# Altium PCB DVL_InterfaceRevA.PcbDoc
Units mil, origin at the board's own origin, x right, y up, seen from the top; angles counter-clockwise.
Board outline 1860 x 1770 mil, 2 copper layers (Top Layer, Bottom Layer); 27 components, 26 nets, 99 pads, 16 vias.
Unrouted connection lines stored in the file: 2.
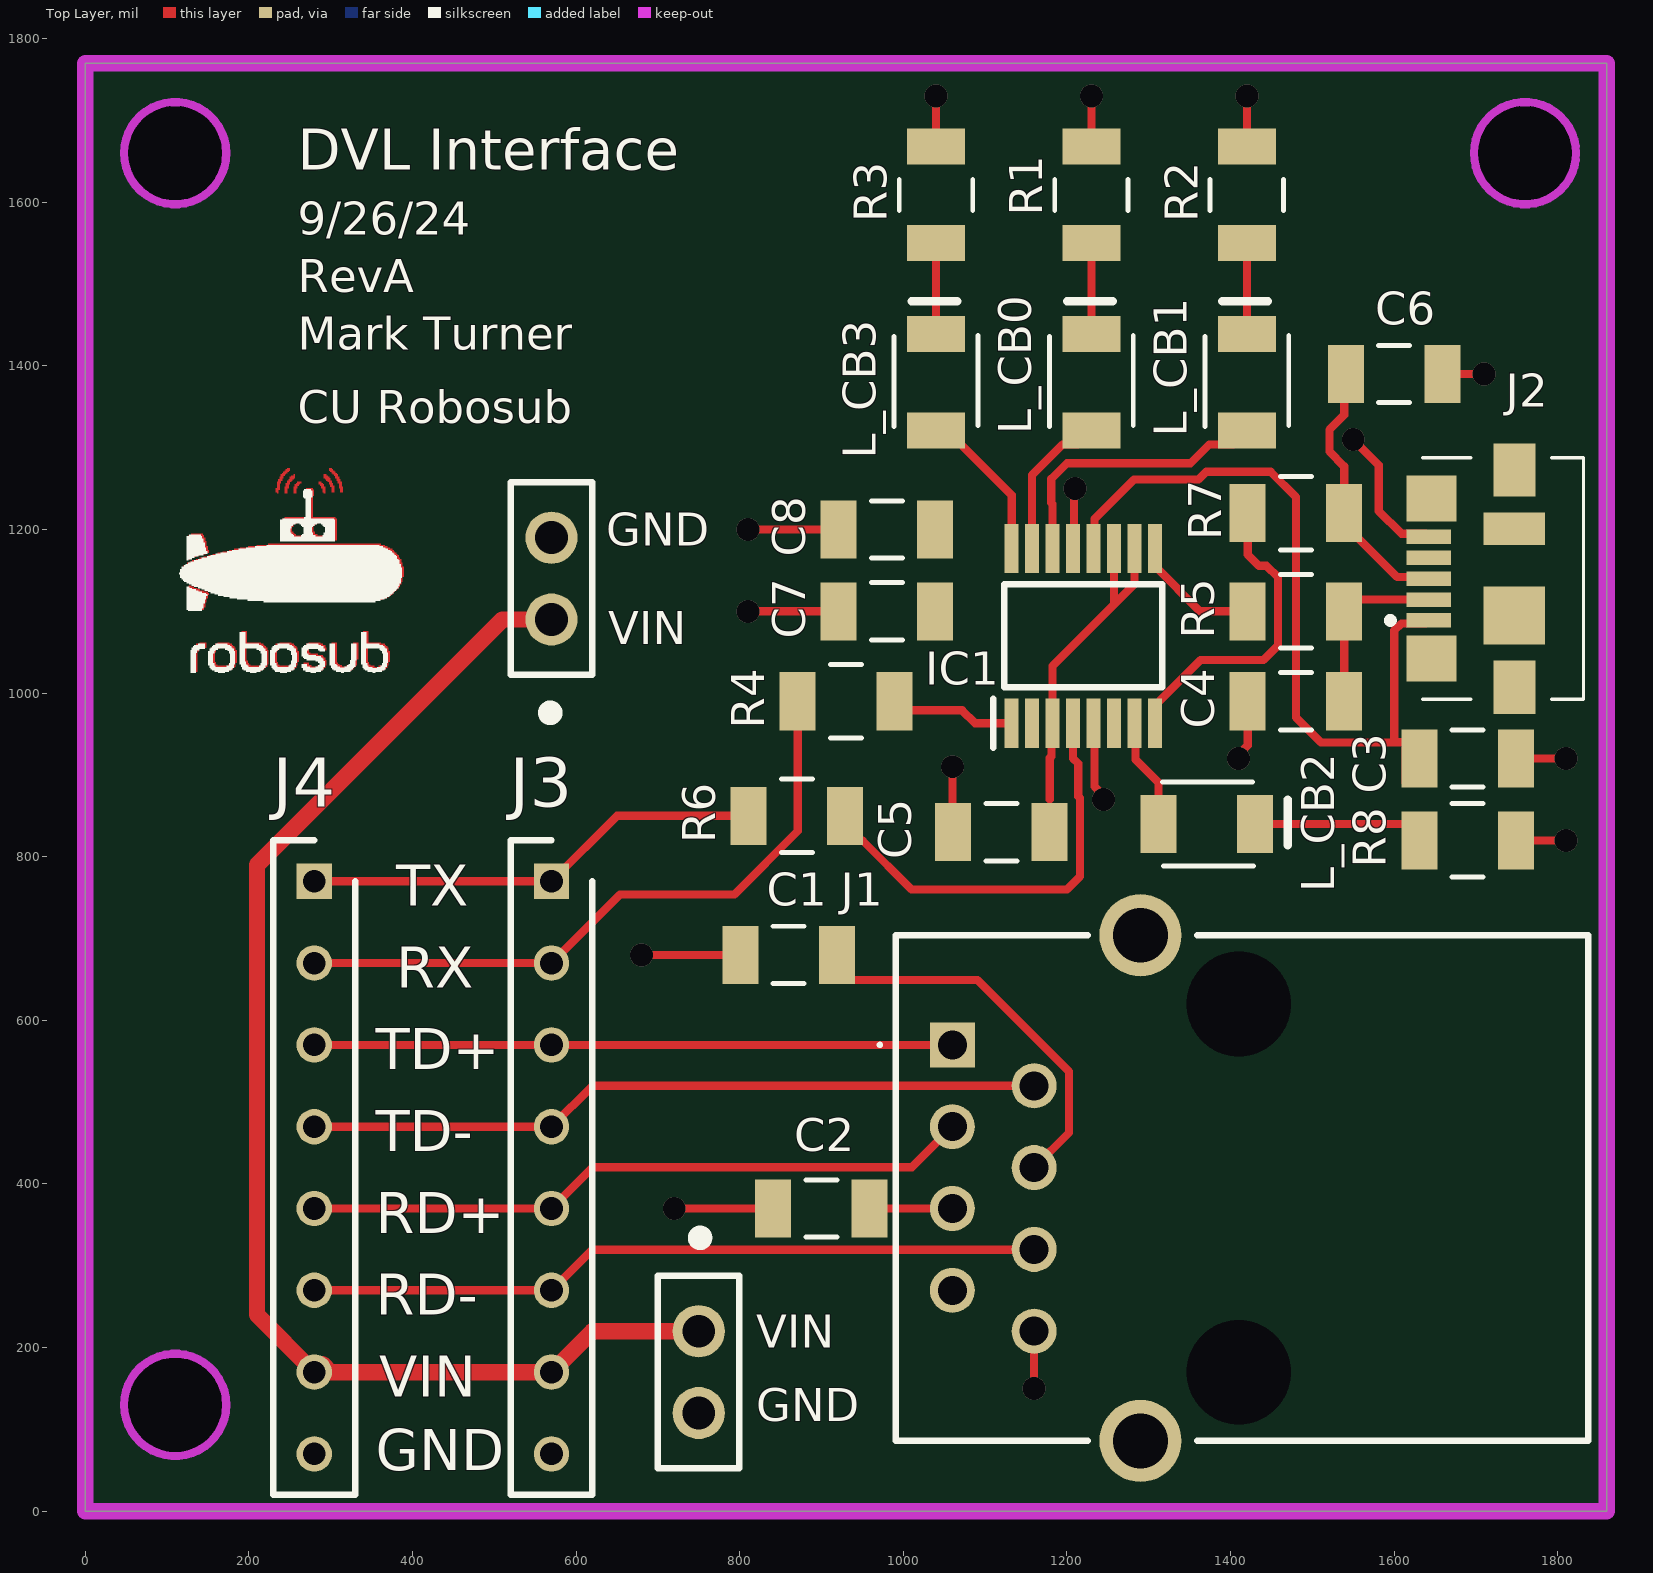
[diagram p0: Top Layer view]
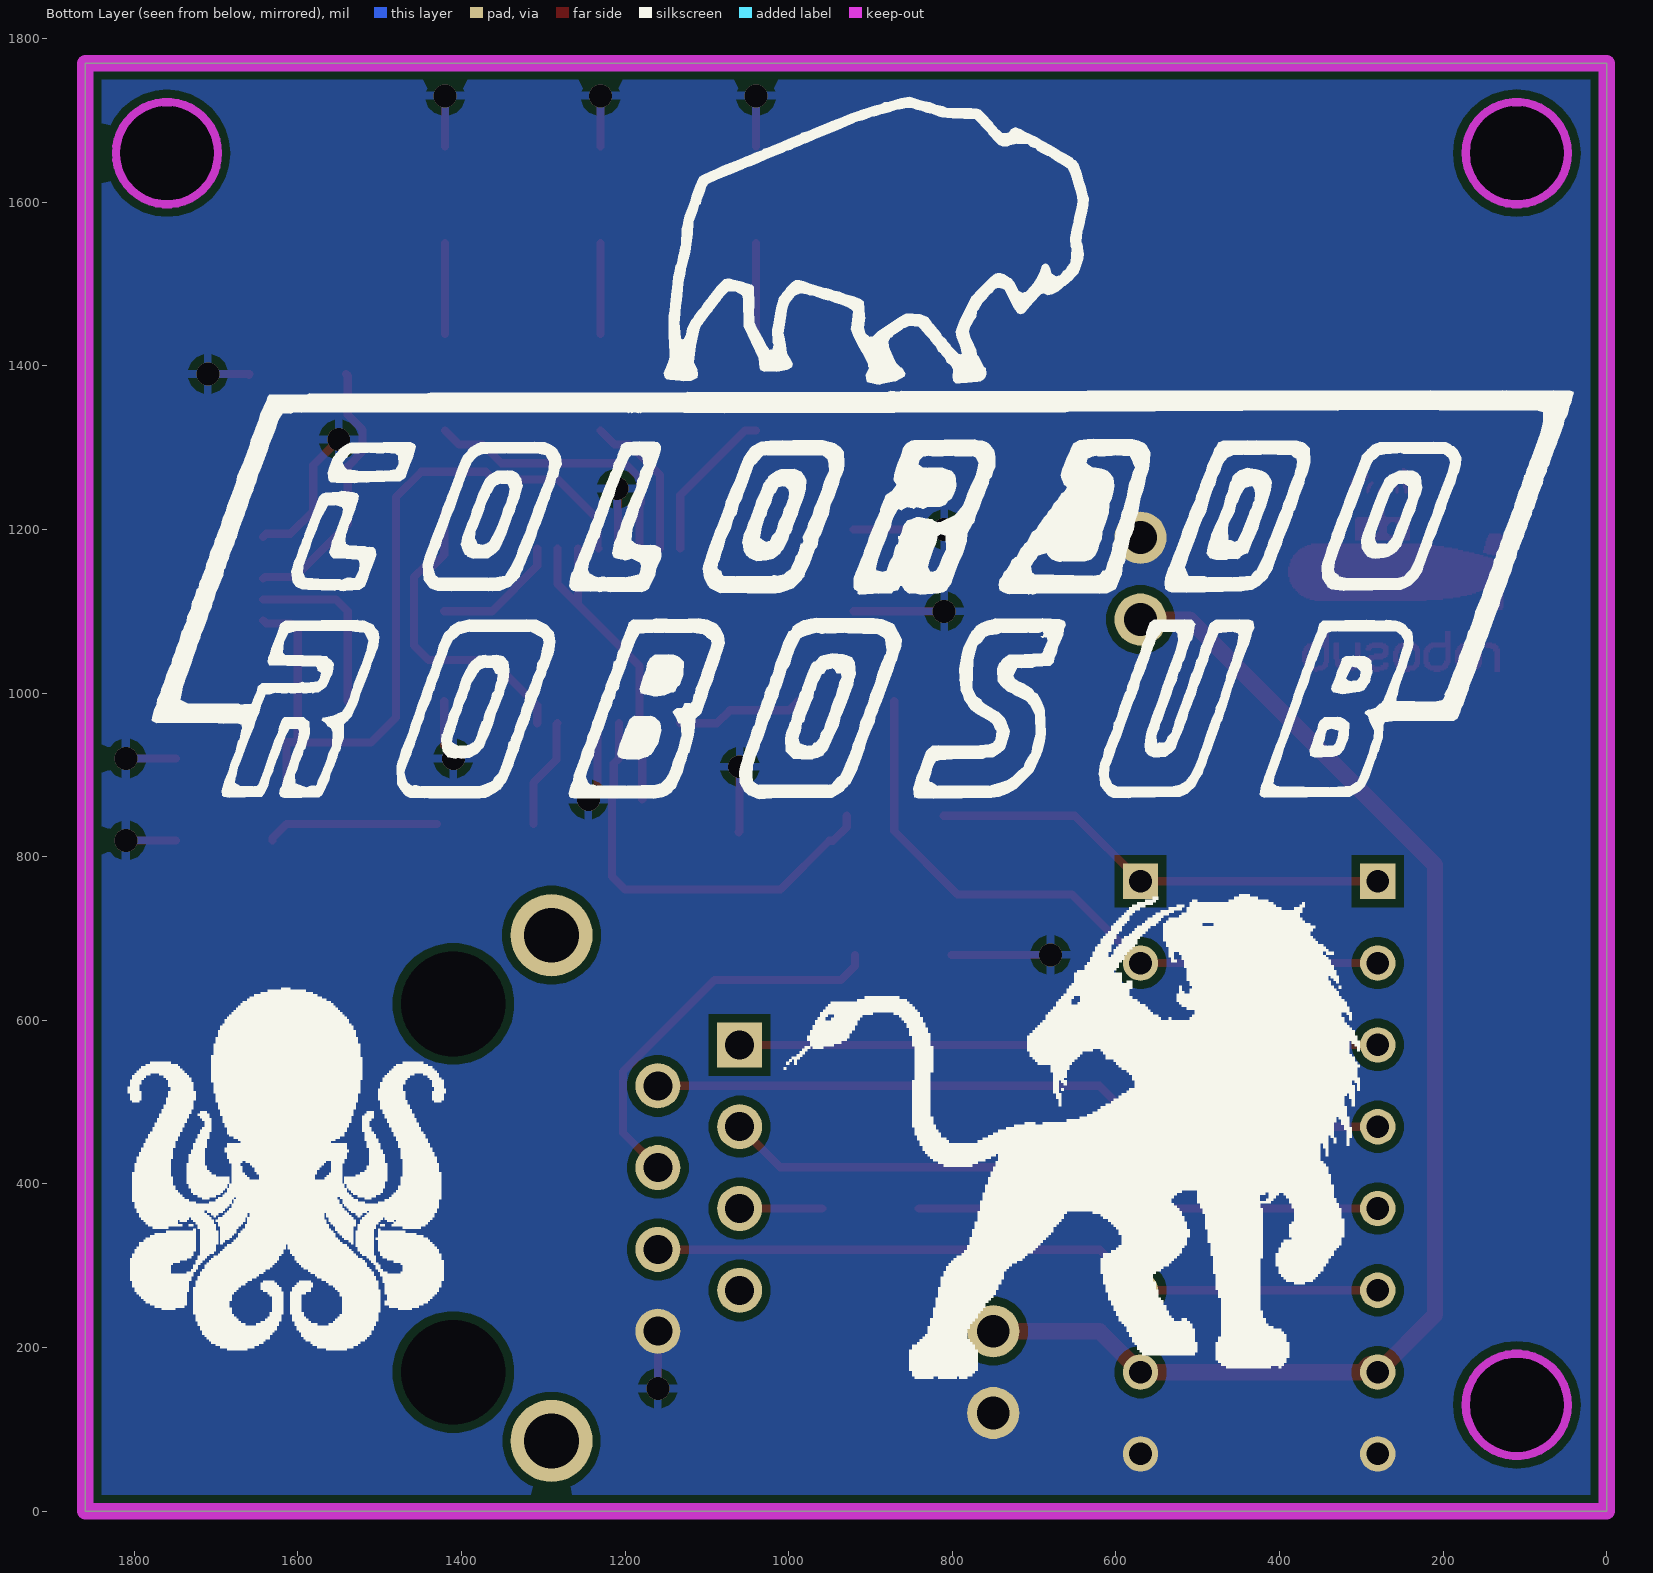
[diagram p1: Bottom Layer view, seen from below]
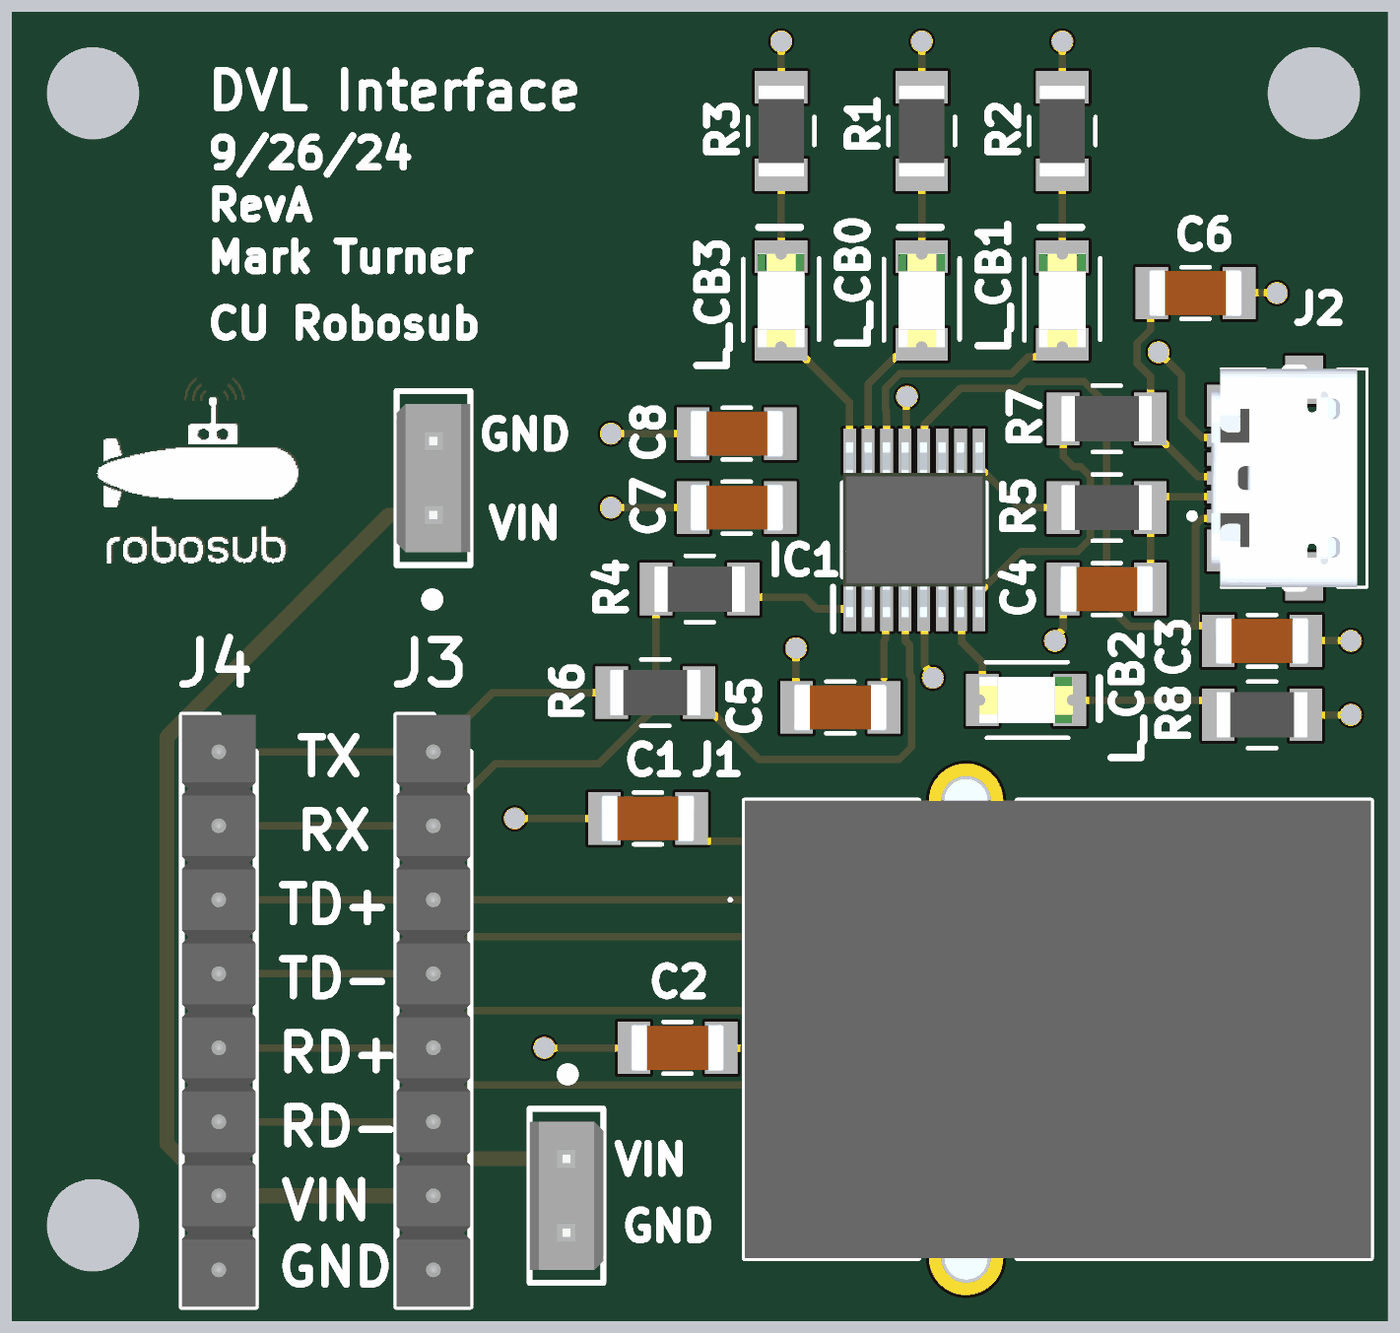
[diagram p2: 3D render of the assembled board from above, using the file's embedded part models]

## Layer stack, top to bottom
Top Solder: solder mask 0.4, Solder Resist, Dk 3.5
Top Layer: signal copper 1.4
Dielectric 1: dielectric 12.6, FR-4, Dk 4.8
Bottom Layer: signal copper 1.4
Bottom Solder: solder mask 0.4, Solder Resist, Dk 3.5

## Board outline
0,0 1860,0 1860,1770 0,1770
cut-out: 47.5,1660 cw(c110,1660) 110,1722.5 cw(c110,1660) 172.5,1660 cw(c110,1660) 110,1597.5 cw(c110,1660)
cut-out: 47.5,130 cw(c110,130) 110,192.5 cw(c110,130) 172.5,130 cw(c110,130) 110,67.5 cw(c110,130)
cut-out: 1697.5,1660 ccw(c1760,1660) 1760,1597.5 ccw(c1760,1660) 1822.5,1660 ccw(c1760,1660) 1760,1722.5 ccw(c1760,1660)

## Design rules (kind name [scope] priority, off if disabled: settings)
BoardOutlineClearance [All] p1: gap=10 ignorepadtopadclearanceinfootprint=FALSE except(0: Arc-SplitContinuation Track-SplitContinuation SMDPad-SplitContinuation THPad-SplitContinuation Via-SplitContinuation Fill-SplitContinuation Poly-SplitContinuation Region-SplitContinuation Text-SplitContinuation)
Clearance [All] p1: gap=10 ignorepadtopadclearanceinfootprint=FALSE
PlaneConnect [All] p1: planeconnectstyle=Direct reliefexpansion=20 reliefentries=4 reliefconductorwidth=10 reliefairgap=10
PolygonConnect [All] p1: thpad.connectstyle=Direct thpad.reliefconductorwidth=10 thpad.reliefentries=4 thpad.polygonreliefangle="90 Angle" thpad.airgapwidth=10 smdpad.connectstyle=Relief smdpad.reliefconductorwidth=10 smdpad.reliefentries=4 smdpad.polygonreliefangle="90 Angle" smdpad.airgapwidth=10 via.connectstyle=Relief via.reliefconductorwidth=10 via.reliefentries=4 via.polygonreliefangle="90 Angle" via.airgapwidth=10
RoutingVias [All] p1: holewidth=13 width=25 viastyle="Through Hole" minholewidth=13 minwidth=25 maxholewidth=60 maxwidth=80
SolderMaskExpansion [All] p1: expansion=4 istentingtop=FALSE
SupplyNets "Schematic Supply Nets" [InNet('GND')] p1: voltage=0.000
UnRoutedNet [All] p1: checkbadconnections=TRUE
Width "Schematic Width Constraint_1" [InNet('VIN')] p1: maxlimit=100 minlimit=10 preferedwidth=20 minimp=50.000000 maximp=50.000000 favimp=50.000000
Width "Schematic Width Constraint" [InNet('GND')] p2: maxlimit=100 minlimit=10 preferedwidth=20 minimp=50.000000 maximp=50.000000 favimp=50.000000
Width [All] p3: maxlimit=20 minlimit=6 preferedwidth=6 minimp=50.000000 maximp=50.000000 favimp=50.000000
28 further rules are at their usual default settings.

## Components (designator, comment, footprint, x,y, rotation, side; value= is the part's Value field where it differs from the comment)
C1 "DNI?" 1206_Passive_Capacitor 860,680 r180 top
C2 "DNI?" 1206_Passive_Capacitor 900,370 r180 top
C3 "10nF" 1206_Passive_Capacitor 1690,920 r180 top
C4 "47pF" 1206_Passive_Capacitor 1480,990 r0 top
C5 "100nF" 1206_Passive_Capacitor 1120,830 r0 top
C6 "47pF" 1206_Passive_Capacitor 1600,1390 r180 top
C7 "100nF" 1206_Passive_Capacitor 980,1100 r0 top
C8 "4.7uF" 1206_Passive_Capacitor 980,1200 r0 top
GND "SW_2Pin_100mil_Switch" 2Pin-Header-Conn 570,1090 r90 top (schematic designator SW2)
IC1 "FT230XS-R" SOP64P599X175-16N 1220,1070 r90 top
J1 "ARJM11D7-009-NN-EW2" ARJM11D7009NNEW2 1060,570 r90 top
J2 "0473461001" 0473461001 1720,1140 r90 top
J3 "08-0625-70" HDRV8W51P0X254_1X8_2032X254X816P 570,770 r270 top
J4 "08-0625-70" HDRV8W51P0X254_1X8_2032X254X816P 280,770 r270 top
L_CB0 "Red" LED_1206 1230,1380 r90 top (schematic designator LED2)
L_CB1 "Red" LED_1206 1420,1380 r90 top (schematic designator LED3)
L_CB2 "Red" LED_1206 1371,840 r0 top (schematic designator LED4)
L_CB3 "Red" LED_1206 1040,1380 r90 top (schematic designator LED1)
R1 "10k" 1206_Passive_Resitor 1230,1609 r270 top value=50Ohm?
R2 "10k" 1206_Passive_Resitor 1420,1609 r90 top value=50Ohm?
R3 "10k" 1206_Passive_Resitor 1040,1609 r270 top value=50Ohm?
R4 "10k" 1206_Passive_Resitor 930,990 r0 top value=27Ohm?
R5 "27Ohm" 1206_Passive_Resitor 1480,1100 r0 top
R6 "10k" 1206_Passive_Resitor 870,850 r0 top value=27Ohm?
R7 "27Ohm" 1206_Passive_Resitor 1480,1220 r0 top
R8 "10k" 1206_Passive_Resitor 1690,820 r0 top value=50Ohm?
VIN "SW_2Pin_100mil_Switch" 2Pin-Header-Conn 750,220 r270 top (schematic designator SW1)

## Footprints (in the part's own frame and the unit in brackets; to place one, negate y for a bottom-side part, rotate by r counter-clockwise, add the part's x,y. Pads: shape width x height; smd on the part's side, far side on the other; paste and mask are expansions set on the pad)
2Pin-Header-Conn [mm]
  round 1.62 hole 1.02: 1(0,0) 2(2.54,0)
  silkscreen extent -3.03,-1.27 4.26,1.26, body extent -1.27,-1.27 3.81,1.27, height 8.13
1206_Passive_Capacitor [mil]
  rect 44x71 smd: 1(-59,0) 2(59,0)
  silkscreen extent -19,-35 19,35, body extent -63,-31 63,32, height 50
1206_Passive_Resitor [mil]
  rect 44x71 smd: 1(-59,0) 2(59,0)
  silkscreen extent -19,-45 19,45, body extent -61,-31 61,31, height 26
0473461001 [mm]
  rect 0.45x1.38 smd: 1(-1.3,1.975) 2(-0.65,1.975) 3(0,1.975) 4(0.65,1.975) 5(1.3,1.975)
  rect 1.425x1.55 smd: MP1(-2.487,1.89) MP2(2.487,1.89)
  rect 1.65x1.3 smd: MP3(-3.375,-0.685) MP6(3.375,-0.685)
  rect 1.8x1.9 smd: MP4(-1.15,-0.685)
  rect 1x1.9 smd: MP5(1.55,-0.685)
  silkscreen extent -3.75,-2.84 3.75,3.26, body extent -3.9,-2.5 3.9,2.5, height 2.72
ARJM11D7009NNEW2 [mm]
  rect 1.4x1.4 hole 0.9: J1(0,0)
  round 1.4 hole 0.9: J2(-1.27,-2.54) J3(-2.54,0) J4(-3.81,-2.54) J5(-5.08,0) J6(-6.35,-2.54) J7(-7.62,0) J8(-8.89,-2.54)
  round 2.55 hole 1.7: MH1(3.405,-5.84) MH2(-12.295,-5.84)
  round 1.625 hole 3.25 unplated: MH3(-10.16,-8.89) MH4(1.27,-8.89)
  silkscreen extent -12.29,-19.74 3.4,2.3, body extent -13.05,-19.74 4.16,1.76, height 14.15
HDRV8W51P0X254_1X8_2032X254X816P [mm]
  rect 1.1x1.1 hole 0.7: 1(0,0)
  round 1.1 hole 0.7: 2(2.54,0) 3(5.08,0) 4(7.62,0) 5(10.16,0) 6(12.7,0) 7(15.24,0) 8(17.78,0)
  silkscreen extent -1.27,-1.27 19.05,1.27, body extent -1.27,-1.27 19.05,1.27, height 8.16
LED_1206 [mil]
  rect 44x71 smd: 1(-59,0) 2(59,0)
  silkscreen extent -54,-51 99,51, body extent -63,-31 63,31, height 28
SOP64P599X175-16N [mm]
  rect 1.526x0.435 smd: 1(-2.712,2.222) 2(-2.712,1.588) 3(-2.712,0.952) 4(-2.712,0.318) 5(-2.712,-0.318) 6(-2.712,-0.952) 7(-2.712,-1.588) 8(-2.712,-2.222) 9(2.712,-2.222) 10(2.712,-1.588) 11(2.712,-0.952) 12(2.712,-0.318) 13(2.712,0.318) 14(2.712,0.952) 15(2.712,1.588) 16(2.712,2.222)
  silkscreen extent -3.47,-2.45 1.6,2.79, body extent -3,-2.45 3,2.45, height 1.75

## Part data
C1 C2 C3 C5 C7 C8: library part C_10uF_1206, "10uF ±10% 50V X5R 1206 Multilayer Ceramic Capacitors MLCC - SMD/SMT RoHS", LCSC Part#=C13585, MFR Part #=CL31A106KBHNNNE, Datasheet=https://datasheet.lcsc.com/lcsc/1810221112_Samsung-Electro-Mechanics-CL31A106KBHNNNE_C13585.pdf, Type=Basic
C4 C6: library part C_47nF_1206, "47nF ±5% 50V C0G 1206 Multilayer Ceramic Capacitors MLCC - SMD/SMT RoHS", LCSC Part#=C21812, MFR Part #=GRM31M5C1H473JA01L, Datasheet=https://datasheet.lcsc.com/lcsc/1810201313_Murata-Electronics-GRM31M5C1H473JA01L_C21812.pdf, Type=Extended
GND VIN: "2Pin Header", LCSC Part#=C124375, Type=Extended
IC1: "Integrated Circuit", Manufacturer_Name="FTDI Chip", Mouser Part Number=895-FT230XS-R, Arrow Part Number=FT230XS-R, Arrow Price/Stock=http://www.arrow.com/en/products/ft230xs-r/ftdi-chip, Datasheet Link=http://www.ftdichip.com/Support/Documents/DataSheets/ICs/DS_FT230X.pdf, Height=1.753mm, Manufacturer_Part_Number=FT230XS-R, Mouser Price/Stock=https://www.mouser.co.uk/ProductDetail/FTDI/FT230XS-R?qs=Gp1Yz1mis3XyCLeYOseSng%3D%3D
J1: "Connector", Manufacturer_Name=ABRACON, Mouser Part Number=815-RJM11D7009NNEW2, Arrow Part Number=ARJM11D7-009-NN-EW2, Arrow Price/Stock=null?region=nac, Datasheet Link=https://abracon.com/Magnetics/ARJM11.pdf, Height=14.05mm, Manufacturer_Part_Number=ARJM11D7-009-NN-EW2, Mouser Price/Stock=https://www.mouser.co.uk/ProductDetail/ABRACON/ARJM11D7-009-NN-EW2?qs=YCa%2FAAYMW03eZFC4XXAjJg%3D%3D
J2: "Connector", Manufacturer_Name=Molex, Mouser Part Number=N/A, Arrow Part Number=0473461001, Arrow Price/Stock=https://www.arrow.com/en/products/0473461001/molex?region=nac, Datasheet Link=https://componentsearchengine.com/Datasheets/1/0473461001.pdf, Height=2.45mm, Manufacturer_Part_Number=0473461001, Mouser Price/Stock=https://www.mouser.co.uk/ProductDetail/Molex/0473461001?qs=2bnkQPT%252BPafTZgGVt%2FOGfA%3D%3D
J3 J4: "Connector", Manufacturer_Name=ARIES, Mouser Part Number=535-08-0625-70, Datasheet Link=https://www.mouser.in/datasheet/2/35/12036-pin-line-header-1224908.pdf, Height=8.16mm, Manufacturer_Part_Number=08-0625-70, Mouser Price/Stock=https://www.mouser.co.uk/ProductDetail/Aries-Electronics/08-0625-70?qs=BpaRKvA4VqGb7C%252By2JfgtQ%3D%3D
L_CB0 L_CB1 L_CB2 L_CB3: library part LED_RED_1206, "Red 621~631nm 1206 Light Emitting Diodes (LED) RoHS", LCSC Part#=C93133, MFR Part #=15-21/R6C-FQ1R1B/2T, Datasheet=https://datasheet.lcsc.com/szlcsc/1811151241_Everlight-Elec-15-21-R6C-FQ1R1B-2T_C93133.pdf, Type=Extended
R1 R2 R3 R4 R6 R8: library part R_10KOhm_1206, "10 kOhms ±5% 0.25W, 1/4W Chip Resistor 1206 (3216 Metric) Automotive AEC-Q200 Thick Film", LCSC Part#=C17902, MFR Part #=RMCF1206FT10K0, Digikey Link=https://www.digikey.com/en/products/detail/stackpole-electronics-inc/RMCF1206FT10K0/1759669, Type=Basic
R5 R7: library part R_22Ohm_1206, "CHIP RESISTOR - SURFACE MOUNT 22OHMS ±1% 1/4W 1206 ROHS", LCSC Part#=C17958, MFR Part #=1206W4F220JT5E, Type=Basic

## Via types
v1: diameter 28, hole 28, Top Layer to Bottom Layer, 16 vias

## Nets (pads, with @x,y where several pads share a name; then routed paths per layer and width w, separated by ;. In a path a pad name is that pad's centre, name@x,y a point inside that pad or via, vN(x,y) a via of type N, cw(c..) or ccw(c..) an arc to the next point about the centre after c; other vN are vias at no path point)
GND: C1.2 C2.2 C3.1 C4.1 C5.1 C6.1 C7.1 C8.1 GND.2 IC1.5 IC1.13 J1.J8 J2.5 J3.8 J4.8 R1.1 R2.2 R3.1 R8.2 VIN.2 | length 1396.5
  Top Layer w10: v1(680,680) C1.2 ; v1(720,370) C2.2 ; v1(810,1100) C7.1 ; v1(810,1200) C8.1 ; R3.1 v1(1040,1730) ; v1(1060,910) 1060,831 C5.1 ; v1(1160,150) J1.J8 ; IC1.13 1208.74,1178.03 1208.74,1248.74 v1(1210,1250) ; R1.1 v1(1230,1730) ; IC1.5 1233.92,961.83 1233.92,885.95 1245,874.87 v1(1245,870) ; v1(1410,920) 1410,924.87 1421,935.87 C4.1 ; R2.2 v1(1420,1730) ; v1(1550,1310) 1581.15,1278.85 1581.15,1222.57 1608.87,1194.86 1638.56,1194.86 J2.5 ; C6.1@1660,1389 C6.1 v1(1710,1390) ; R8.2 v1(1810,820) ; C3.1 v1(1810,920)
NetC1_1: C1.1 J1.J4 | length 485.7
  Top Layer w10: C1.1 919,666.5 936,649.5 1090.69,649.5 1202.56,537.63 1202.56,462.56 J1.J4
NetC2_1: C2.1 J1.J5 | length 101
  Top Layer w10: C2.1 J1.J5
NetC4_2: C4.2 J2.2 R5.2 | length 219.2
  Top Layer w10: C4.2 R5.2 1553.41,1114.41 J2.2
NetC5_2: C5.2 IC1.3 IC1.10 IC1.11 | length 418.2
  Top Layer w10: 1179,870 1179,920.5 1181.04,922.54 1181.04,961.75 IC1.3 1182.52,1033.22 1257.48,1108.18 ; IC1.11 1257.48,1108.18 ; IC1.10 1282.52,1133.22 1257.48,1108.18
NetC6_2: C6.2 J2.3 R7.2 | length 330
  Top Layer w10: C6.2 1539,1388 1539,1340.01 1521,1322.01 1521,1295.26 1539,1277.26 R7.2 1539,1206.5 1603.77,1141.73 1640.51,1141.73 J2.3
NetIC1_1: IC1.1 R4.2 | length 154.6
  Top Layer w10: R4.2 1000,979 1072.01,979 1087.78,963.23 IC1.1
NetIC1_4: IC1.4 R6.2 | length 529.6
  Top Layer w10: R6.2 929,836.5 946,819.5 950.5,819.5 1010,760 1200,760 1216,776 1216,871.71 1213.92,873.8 1213.92,913.8 1207.48,920.23 IC1.4
NetIC1_7: IC1.7 L_CB2.1 | length 135.4
  Top Layer w10: IC1.7 1283.92,961.83 1283.92,918.58 1312,890.5 L_CB2.1
NetIC1_8: IC1.8 R7.1 | length 384.9
  Top Layer w10: IC1.8 1307.48,984.7 1363.28,1040.5 1440.21,1040.5 1458,1058.29 1458,1141.71 1444.11,1155.61 1434.89,1155.61 1421,1169.5 R7.1
NetIC1_9: IC1.9 R5.1 | length 157.9
  Top Layer w10: IC1.9 1307.48,1155.3 1362.78,1100 R5.1
NetIC1_14: IC1.14 L_CB1.1 | length 349.3
  Top Layer w10: IC1.14 1182.52,1231.15 1181,1232.67 1181,1262.01 1199.99,1281.01 1351.01,1281.01 1374,1304 1403,1304 L_CB1.1
NetIC1_15: IC1.15 L_CB0.1 | length 185
  Top Layer w10: IC1.15 1157.48,1266.78 1194.7,1304 1213,1304 L_CB0.1
NetIC1_16: IC1.16 L_CB3.1 | length 190.5
  Top Layer w10: L_CB3.1 1053.5,1321 1132.52,1241.98 IC1.16
NetLED1_2: L_CB3.2 R3.2 | length 111
  Top Layer w10: L_CB3.2 R3.2
NetLED2_2: L_CB0.2 R1.2 | length 111
  Top Layer w10: L_CB0.2 R1.2
NetLED3_2: L_CB1.2 R2.1 | length 111
  Top Layer w10: L_CB1.2 R2.1
NetLED4_2: L_CB2.2 R8.1 | length 211
  Top Layer w10: L_CB2.2 1614,840 1631,823 R8.1
RD+: J1.J3 J3.5 J4.5 | length 801.4
  Top Layer w10: J4.5@300,370 J3.5 620.5,420.5 1010.5,420.5 J1.J3
RD-: J1.J6 J3.6 J4.6 | length 880.7
  Top Layer w10: J4.6@300,270 J3.6 619.5,319.5 1159.5,319.5 J1.J6
RX_DVL: J3.2 J4.2 R4.1 | length 796.5
  Top Layer w10: J4.2@300,670 J3.2 653.83,753.83 793.54,753.83 871,831.29 R4.1
TD+: J1.J1 J3.3 J4.3 | length 760
  Top Layer w10: J4.3@300,570 J3.3 J1.J1
TD-: J1.J2 J3.4 J4.4 | length 880.7
  Top Layer w10: J4.4@300,470 J3.4 620,520 J1.J2
TX_DVL: J3.1 J4.1 R6.1 | length 544.1
  Top Layer w10: J4.1@300,770 J3.1 650,850 R6.1
USB_Vcc: C3.2 C7.2 C8.2 IC1.12 J2.1 | length 969
  Top Layer w10: IC1.12 1233.92,1178.17 1233.92,1213.02 1281.9,1261.01 1360.81,1261.01 1370.3,1270.5 1449.21,1270.5 1480,1239.71 1480,970.29 1510.79,939.5 1599.58,939.5 1600.08,940 ; C3.2@1614,890.5 1614,940 1600.08,940 ; J2.1 1638.56,1085.14 1608.87,1085.14 1600.08,1076.35 1600.08,940
VIN: GND.1 J3.7 J4.7 VIN.1 | length 1618.1
  Top Layer w20: J4.7 210,240 210,790 510,1090 GND.1 ; J4.7@290,180 300,170 J3.7 620,220 VIN.1
pads on no net: IC1.2 IC1.6 J1.J7 J1.MH1 J1.MH2 J1.MH3 J1.MH4 J2.4 J2.MP1 J2.MP2 J2.MP3 J2.MP4 J2.MP5 J2.MP6

## Polygon pours and split planes (outlines as drawn)
GND on Bottom Layer "GND_L02_P000" (solid, pour order 0): -280,1990 1850,1990 1850,0 1840,10 -290,10

## Keep-outs
Keep-Out Layer:
  circle w10: c1760,1660 r62.5
  circle w10: c110,1660 r62.5
  circle w10: c110,130 r62.5
  pour cut-out: 1697.5,1660 ccw(c1760,1660) 1760,1597.5 ccw(c1760,1660) 1822.5,1660 ccw(c1760,1660) 1760,1722.5 ccw(c1760,1660)
  lines w20: 0,0 1860,0 1860,1770 0,1770 0,0

## Other copper
Top Layer:
  region: 287.22,1255.05 285.67,1255.05 285.67,1258.14 288.76,1258.14 288.76,1256.6 290.31,1256.6 290.31,1255.05 291.86,1255.05 291.86,1251.96 293.4,1251.96 293.4,1244.23 291.86,1244.23 291.86,1245.77 290.31,1245.77 290.31,1250.41 288.76,1250.41 288.76,1253.51 287.22,1253.51
  region: 296.49,1258.14 296.49,1259.69 294.95,1259.69 294.95,1261.24 293.4,1261.24 293.4,1262.78 291.86,1262.78 291.86,1267.42 294.95,1267.42 294.95,1265.88 296.49,1265.88 296.49,1264.33 298.04,1264.33 298.04,1262.78 299.59,1262.78 299.59,1259.69 301.13,1259.69 301.13,1256.6 302.68,1256.6 302.68,1253.51 304.23,1253.51 304.23,1245.77 301.13,1245.77 301.13,1251.96 299.59,1251.96 299.59,1255.05 298.04,1255.05 298.04,1258.14
  region: 260.93,1255.05 260.93,1253.51 259.38,1253.51 259.38,1250.41 257.84,1250.41 257.84,1244.23 254.74,1244.23 254.74,1251.96 256.29,1251.96 256.29,1255.05 257.84,1255.05 257.84,1256.6 259.38,1256.6 259.38,1258.14 264.02,1258.14 264.02,1256.6 262.47,1256.6 262.47,1255.05
  region: 175.88,1060.21 178.97,1060.21 178.97,1058.66 180.52,1058.66 180.52,1057.11 182.06,1057.11 182.06,1055.57 183.61,1055.57 183.61,1052.47 185.15,1052.47 185.15,1037.01 183.61,1037.01 183.61,1032.37 182.06,1032.37 182.06,1030.82 180.52,1030.82 180.52,1029.28 177.42,1029.28 177.42,1027.73 172.78,1027.73 172.78,1026.19 165.05,1026.19 165.05,1027.73 160.41,1027.73 160.41,1029.28 157.32,1029.28 157.32,1030.82 155.77,1030.82 155.77,1032.37 154.23,1032.37 154.23,1035.46 152.68,1035.46 152.68,1052.47 154.23,1052.47 154.23,1055.57 155.77,1055.57 155.77,1057.11 157.32,1057.11 157.32,1058.66 158.87,1058.66 158.87,1060.21 161.96,1060.21 161.96,1061.75 175.88,1061.75 hole: 172.78,1055.57 165.05,1055.57 165.05,1054.02 161.96,1054.02 161.96,1052.47 160.41,1052.47 160.41,1049.38 158.87,1049.38 158.87,1038.56 160.41,1038.56 160.41,1035.46 161.96,1035.46 161.96,1033.92 174.33,1033.92 174.33,1035.46 177.42,1035.46 177.42,1038.56 178.97,1038.56 178.97,1049.38 177.42,1049.38 177.42,1052.47 175.88,1052.47 175.88,1054.02 172.78,1054.02
  region: 298.04,1275.15 301.13,1275.15 301.13,1273.61 302.68,1273.61 302.68,1272.06 304.23,1272.06 304.23,1270.52 305.77,1270.52 305.77,1268.97 307.32,1268.97 307.32,1267.42 308.87,1267.42 308.87,1264.33 310.41,1264.33 310.41,1261.24 311.96,1261.24 311.96,1258.14 313.51,1258.14 313.51,1251.96 315.05,1251.96 315.05,1245.77 311.96,1245.77 311.96,1250.41 310.41,1250.41 310.41,1256.6 308.87,1256.6 308.87,1259.69 307.32,1259.69 307.32,1262.78 305.77,1262.78 305.77,1265.88 304.23,1265.88 304.23,1267.42 302.68,1267.42 302.68,1268.97 301.13,1268.97 301.13,1270.52 299.59,1270.52 299.59,1272.06 298.04,1272.06 298.04,1273.61
  region: 293.4,1055.57 294.95,1055.57 294.95,1052.47 288.76,1052.47 288.76,1054.02 287.22,1054.02 287.22,1055.57 274.85,1055.57 274.85,1054.02 273.3,1054.02 273.3,1049.38 274.85,1049.38 274.85,1047.84 284.12,1047.84 284.12,1046.29 290.31,1046.29 290.31,1044.74 291.86,1044.74 291.86,1043.2 293.4,1043.2 293.4,1040.1 294.95,1040.1 294.95,1033.92 293.4,1033.92 293.4,1030.82 291.86,1030.82 291.86,1029.28 290.31,1029.28 290.31,1027.73 284.12,1027.73 284.12,1026.19 277.94,1026.19 277.94,1027.73 271.75,1027.73 271.75,1029.28 268.66,1029.28 268.66,1032.37 267.11,1032.37 267.11,1037.01 273.3,1037.01 273.3,1033.92 276.39,1033.92 276.39,1032.37 284.12,1032.37 284.12,1033.92 287.22,1033.92 287.22,1035.46 288.76,1035.46 288.76,1038.56 287.22,1038.56 287.22,1040.1 284.12,1040.1 284.12,1041.65 273.3,1041.65 273.3,1043.2 270.21,1043.2 270.21,1044.74 268.66,1044.74 268.66,1046.29 267.11,1046.29 267.11,1057.11 268.66,1057.11 268.66,1058.66 270.21,1058.66 270.21,1060.21 273.3,1060.21 273.3,1061.75 287.22,1061.75 287.22,1060.21 290.31,1060.21 290.31,1058.66 293.4,1058.66 293.4,1057.11
  region: 137.22,1035.46 137.22,1026.19 131.03,1026.19 131.03,1054.02 132.58,1054.02 132.58,1057.11 134.12,1057.11 134.12,1058.66 135.67,1058.66 135.67,1060.21 140.31,1060.21 140.31,1061.75 148.04,1061.75 148.04,1055.57 141.86,1055.57 141.86,1054.02 138.76,1054.02 138.76,1050.93 137.22,1050.93 137.22,1037.01
  region: 144.95,1105.05 144.95,1101.96 127.94,1101.96 127.94,1103.51 126.39,1103.51 126.39,1131.34 129.48,1131.34 129.48,1129.79 132.58,1129.79 132.58,1128.25 137.22,1128.25 137.22,1126.7 140.31,1126.7 140.31,1125.15 144.95,1125.15 144.95,1123.61 149.59,1123.61 149.59,1122.06 151.13,1122.06 151.13,1120.52 149.59,1120.52 149.59,1115.88 148.04,1115.88 148.04,1111.24 146.49,1111.24 146.49,1105.05
  region: 250.1,1255.05 248.56,1255.05 248.56,1250.41 247.01,1250.41 247.01,1244.23 243.92,1244.23 243.92,1251.96 245.46,1251.96 245.46,1256.6 247.01,1256.6 247.01,1259.69 248.56,1259.69 248.56,1261.24 250.1,1261.24 250.1,1264.33 251.65,1264.33 251.65,1265.88 254.74,1265.88 254.74,1267.42 256.29,1267.42 256.29,1262.78 254.74,1262.78 254.74,1261.24 253.2,1261.24 253.2,1259.69 251.65,1259.69 251.65,1258.14 250.1,1258.14 250.1,1256.6
  region: 248.56,1270.52 247.01,1270.52 247.01,1268.97 245.46,1268.97 245.46,1267.42 243.92,1267.42 243.92,1265.88 242.37,1265.88 242.37,1262.78 240.82,1262.78 240.82,1259.69 239.28,1259.69 239.28,1256.6 237.73,1256.6 237.73,1248.87 236.19,1248.87 236.19,1244.23 234.64,1244.23 234.64,1245.77 233.09,1245.77 233.09,1250.41 234.64,1250.41 234.64,1258.14 236.19,1258.14 236.19,1261.24 237.73,1261.24 237.73,1264.33 239.28,1264.33 239.28,1267.42 240.82,1267.42 240.82,1268.97 242.37,1268.97 242.37,1270.52 243.92,1270.52 243.92,1272.06 245.46,1272.06 245.46,1273.61 247.01,1273.61 247.01,1275.15 250.1,1275.15 250.1,1272.06 248.56,1272.06
  region: 301.13,1043.2 301.13,1061.75 307.32,1061.75 307.32,1037.01 308.87,1037.01 308.87,1035.46 310.41,1035.46 310.41,1033.92 313.51,1033.92 313.51,1032.37 319.69,1032.37 319.69,1033.92 322.78,1033.92 322.78,1035.46 324.33,1035.46 324.33,1037.01 325.88,1037.01 325.88,1041.65 327.42,1041.65 327.42,1061.75 333.61,1061.75 333.61,1041.65 332.06,1041.65 332.06,1033.92 330.52,1033.92 330.52,1032.37 328.97,1032.37 328.97,1030.82 327.42,1030.82 327.42,1029.28 325.88,1029.28 325.88,1027.73 318.14,1027.73 318.14,1026.19 315.05,1026.19 315.05,1027.73 308.87,1027.73 308.87,1029.28 305.77,1029.28 305.77,1030.82 304.23,1030.82 304.23,1032.37 302.68,1032.37 302.68,1035.46 301.13,1035.46 301.13,1041.65
  region: 277.94,1248.87 279.48,1248.87 279.48,1241.13 277.94,1241.13 277.94,1214.85 305.77,1214.85 305.77,1213.3 307.32,1213.3 307.32,1187.01 240.82,1187.01 240.82,1213.3 243.92,1213.3 243.92,1214.85 270.21,1214.85 270.21,1216.39 271.75,1216.39 271.75,1239.59 270.21,1239.59 270.21,1241.13 268.66,1241.13 268.66,1248.87 270.21,1248.87 270.21,1250.41 277.94,1250.41 hole: 264.02,1208.66 259.38,1208.66 259.38,1207.11 256.29,1207.11 256.29,1205.57 254.74,1205.57 254.74,1202.47 253.2,1202.47 253.2,1197.84 254.74,1197.84 254.74,1196.29 256.29,1196.29 256.29,1194.74 257.84,1194.74 257.84,1193.2 265.57,1193.2 265.57,1194.74 267.11,1194.74 267.11,1196.29 268.66,1196.29 268.66,1204.02 267.11,1204.02 267.11,1205.57 265.57,1205.57 265.57,1207.11 264.02,1207.11 hole: 290.31,1208.66 285.67,1208.66 285.67,1207.11 282.58,1207.11 282.58,1205.57 281.03,1205.57 281.03,1204.02 279.48,1204.02 279.48,1197.84 281.03,1197.84 281.03,1194.74 284.12,1194.74 284.12,1193.2 291.86,1193.2 291.86,1194.74 293.4,1194.74 293.4,1197.84 294.95,1197.84 294.95,1204.02 293.4,1204.02 293.4,1205.57 291.86,1205.57 291.86,1207.11 290.31,1207.11
  region: 384.64,1163.81 386.19,1163.81 386.19,1159.18 387.73,1159.18 387.73,1154.54 389.28,1154.54 389.28,1142.16 387.73,1142.16 387.73,1135.98 386.19,1135.98 386.19,1132.89 384.64,1132.89 384.64,1129.79 383.09,1129.79 383.09,1128.25 381.55,1128.25 381.55,1126.7 380,1126.7 380,1125.15 378.45,1125.15 378.45,1123.61 376.91,1123.61 376.91,1122.06 375.36,1122.06 375.36,1120.52 373.81,1120.52 373.81,1118.97 370.72,1118.97 370.72,1117.42 367.63,1117.42 367.63,1115.88 362.99,1115.88 362.99,1114.33 356.8,1114.33 356.8,1112.78 220.72,1112.78 220.72,1114.33 200.62,1114.33 200.62,1115.88 188.25,1115.88 188.25,1117.42 178.97,1117.42 178.97,1118.97 171.24,1118.97 171.24,1120.52 165.05,1120.52 165.05,1122.06 160.41,1122.06 160.41,1123.61 155.77,1123.61 155.77,1125.15 152.68,1125.15 152.68,1126.7 148.04,1126.7 148.04,1128.25 144.95,1128.25 144.95,1129.79 140.31,1129.79 140.31,1131.34 135.67,1131.34 135.67,1132.89 132.58,1132.89 132.58,1134.43 129.48,1134.43 129.48,1135.98 126.39,1135.98 126.39,1137.53 123.3,1137.53 123.3,1139.07 121.75,1139.07 121.75,1140.62 120.21,1140.62 120.21,1142.16 118.66,1142.16 118.66,1146.8 117.11,1146.8 117.11,1148.35 118.66,1148.35 118.66,1152.99 120.21,1152.99 120.21,1156.08 123.3,1156.08 123.3,1157.63 124.85,1157.63 124.85,1159.18 127.94,1159.18 127.94,1160.72 131.03,1160.72 131.03,1162.27 135.67,1162.27 135.67,1163.81 140.31,1163.81 140.31,1165.36 144.95,1165.36 144.95,1166.91 151.13,1166.91 151.13,1168.45 155.77,1168.45 155.77,1170 161.96,1170 161.96,1171.55 168.14,1171.55 168.14,1173.09 175.88,1173.09 175.88,1174.64 182.06,1174.64 182.06,1176.19 189.79,1176.19 189.79,1177.73 199.07,1177.73 199.07,1179.28 209.9,1179.28 209.9,1180.82 223.81,1180.82 223.81,1182.37 361.44,1182.37 361.44,1180.82 366.08,1180.82 366.08,1179.28 369.18,1179.28 369.18,1177.73 372.27,1177.73 372.27,1176.19 375.36,1176.19 375.36,1174.64 376.91,1174.64 376.91,1173.09 378.45,1173.09 378.45,1171.55 380,1171.55 380,1170 381.55,1170 381.55,1168.45 383.09,1168.45 383.09,1165.36 384.64,1165.36
  region: 146.49,1170 140.31,1170 140.31,1168.45 135.67,1168.45 135.67,1166.91 132.58,1166.91 132.58,1165.36 127.94,1165.36 127.94,1163.81 126.39,1163.81 126.39,1193.2 129.48,1193.2 129.48,1194.74 143.4,1194.74 143.4,1193.2 144.95,1193.2 144.95,1190.1 146.49,1190.1 146.49,1185.46 148.04,1185.46 148.04,1179.28 149.59,1179.28 149.59,1174.64 151.13,1174.64 151.13,1171.55 146.49,1171.55
  region: 251.65,1060.21 254.74,1060.21 254.74,1058.66 256.29,1058.66 256.29,1057.11 257.84,1057.11 257.84,1055.57 259.38,1055.57 259.38,1050.93 260.93,1050.93 260.93,1038.56 259.38,1038.56 259.38,1033.92 257.84,1033.92 257.84,1030.82 256.29,1030.82 256.29,1029.28 253.2,1029.28 253.2,1027.73 248.56,1027.73 248.56,1026.19 240.82,1026.19 240.82,1027.73 234.64,1027.73 234.64,1029.28 233.09,1029.28 233.09,1030.82 231.55,1030.82 231.55,1032.37 230,1032.37 230,1035.46 228.45,1035.46 228.45,1054.02 230,1054.02 230,1057.11 231.55,1057.11 231.55,1058.66 233.09,1058.66 233.09,1060.21 237.73,1060.21 237.73,1061.75 251.65,1061.75 hole: 248.56,1055.57 239.28,1055.57 239.28,1054.02 237.73,1054.02 237.73,1052.47 236.19,1052.47 236.19,1050.93 234.64,1050.93 234.64,1038.56 236.19,1038.56 236.19,1035.46 237.73,1035.46 237.73,1033.92 250.1,1033.92 250.1,1035.46 251.65,1035.46 251.65,1037.01 253.2,1037.01 253.2,1041.65 254.74,1041.65 254.74,1047.84 253.2,1047.84 253.2,1052.47 251.65,1052.47 251.65,1054.02 248.56,1054.02
  region: 197.53,1061.75 214.54,1061.75 214.54,1060.21 217.63,1060.21 217.63,1058.66 219.18,1058.66 219.18,1057.11 220.72,1057.11 220.72,1055.57 222.27,1055.57 222.27,1052.47 223.81,1052.47 223.81,1035.46 222.27,1035.46 222.27,1032.37 220.72,1032.37 220.72,1030.82 219.18,1030.82 219.18,1029.28 216.08,1029.28 216.08,1027.73 211.44,1027.73 211.44,1026.19 203.71,1026.19 203.71,1027.73 199.07,1027.73 199.07,1029.28 195.98,1029.28 195.98,1030.82 194.43,1030.82 194.43,1033.92 192.89,1033.92 192.89,1037.01 191.34,1037.01 191.34,1075.67 197.53,1075.67 hole: 211.44,1055.57 197.53,1055.57 197.53,1040.1 199.07,1040.1 199.07,1037.01 200.62,1037.01 200.62,1035.46 202.16,1035.46 202.16,1033.92 214.54,1033.92 214.54,1035.46 216.08,1035.46 216.08,1038.56 217.63,1038.56 217.63,1047.84 217.63,1049.38 216.08,1049.38 216.08,1052.47 214.54,1052.47 214.54,1054.02 211.44,1054.02
  region: 345.98,1061.75 361.44,1061.75 361.44,1060.21 366.08,1060.21 366.08,1058.66 367.63,1058.66 367.63,1057.11 369.18,1057.11 369.18,1055.57 370.72,1055.57 370.72,1050.93 372.27,1050.93 372.27,1038.56 370.72,1038.56 370.72,1033.92 369.18,1033.92 369.18,1030.82 367.63,1030.82 367.63,1029.28 364.54,1029.28 364.54,1027.73 356.8,1027.73 356.8,1026.19 353.71,1026.19 353.71,1027.73 347.53,1027.73 347.53,1029.28 344.43,1029.28 344.43,1030.82 342.89,1030.82 342.89,1032.37 341.34,1032.37 341.34,1037.01 339.79,1037.01 339.79,1075.67 345.98,1075.67 hole: 361.44,1055.57 345.98,1055.57 345.98,1038.56 347.53,1038.56 347.53,1035.46 349.07,1035.46 349.07,1033.92 353.71,1033.92 353.71,1032.37 358.35,1032.37 358.35,1033.92 362.99,1033.92 362.99,1035.46 364.54,1035.46 364.54,1038.56 366.08,1038.56 366.08,1049.38 364.54,1049.38 364.54,1052.47 362.99,1052.47 362.99,1054.02 361.44,1054.02

## Silkscreen, mask and mechanical layers (free items; w line width, h text height)
Top Overlay:
  drawing of 11 lines, arcs and shapes, not listed
  text "DVL Interface" at 260,1640 h50
  text "9/26/24" at 260,1560 h40
  text "RevA" at 260,1490 h40
  text "Mark Turner" at 260,1420 h40
  text "CU Robosub" at 260,1330 h40
  text "VIN" at 639.17,1060 h40
  text "TX" at 380,740 h50
  text "RX" at 380,640 h50
  text "TD+" at 355.01,540 h50
  text "TD-" at 355.01,440 h50
  text "RD+" at 355.01,340 h50
  text "RD-" at 355.01,240 h50
  text "VIN" at 359.17,140 h50
  text "GND" at 820,110 h40
  text "GND" at 355.01,50 h50
Bottom Overlay:
  drawing of 39 lines, arcs and shapes, not listed